# Altium PCB STMFORASIC.PcbDoc
Units mm, origin at the board's own origin, x right, y up, seen from the top; angles counter-clockwise.
Board outline 65 x 30 mm, 2 copper layers (Top Layer, Bottom Layer), stack 1.536 mm thick; 27 components, 36 nets, 187 pads, 54 vias.
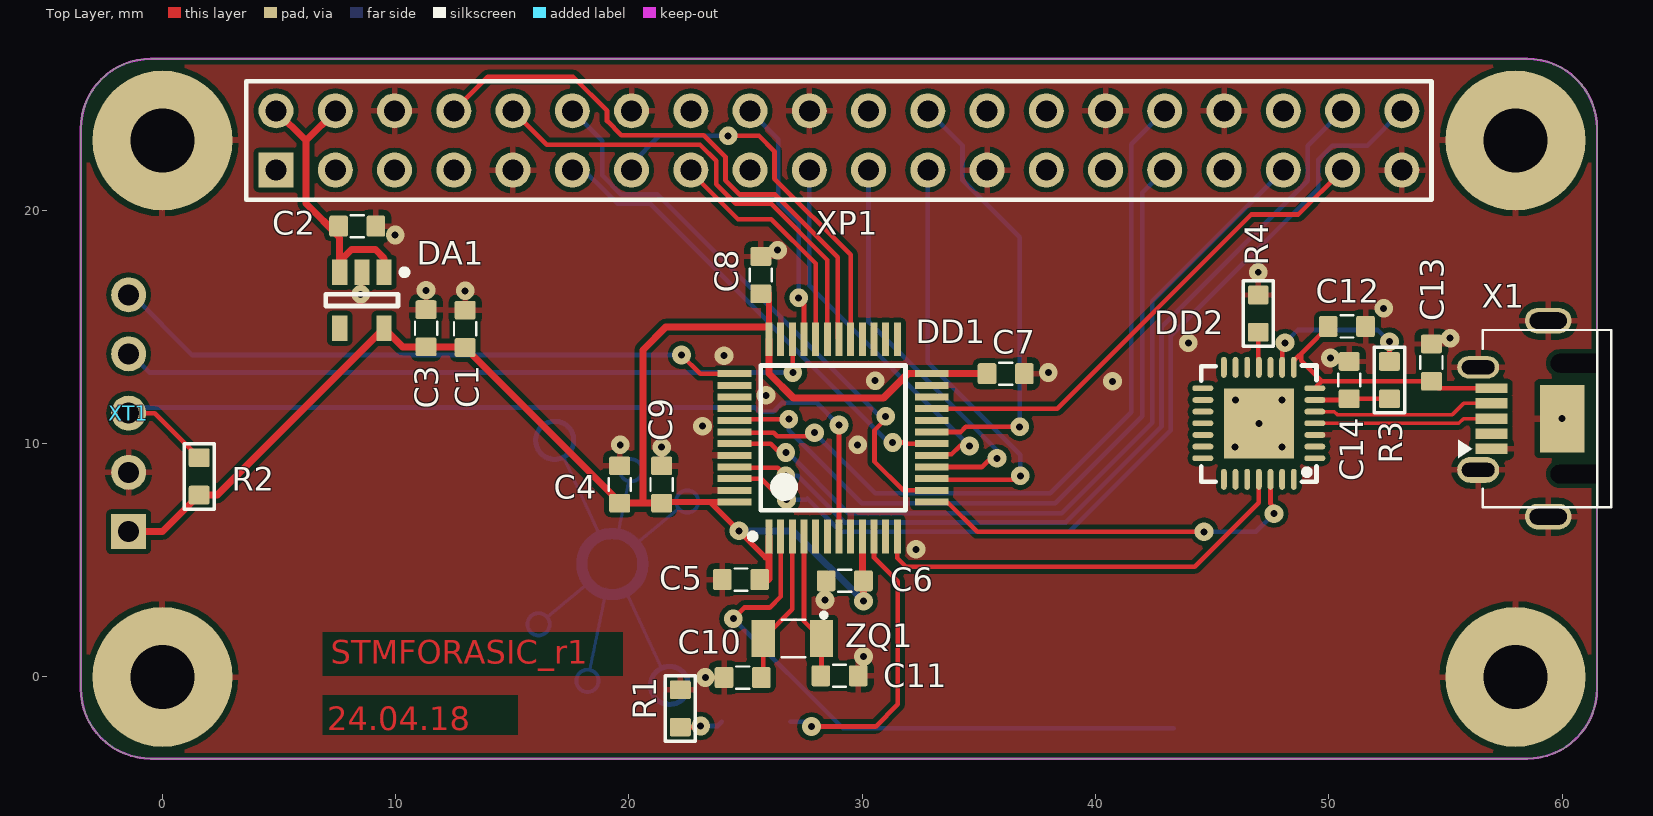
[diagram p0: Top Layer view]
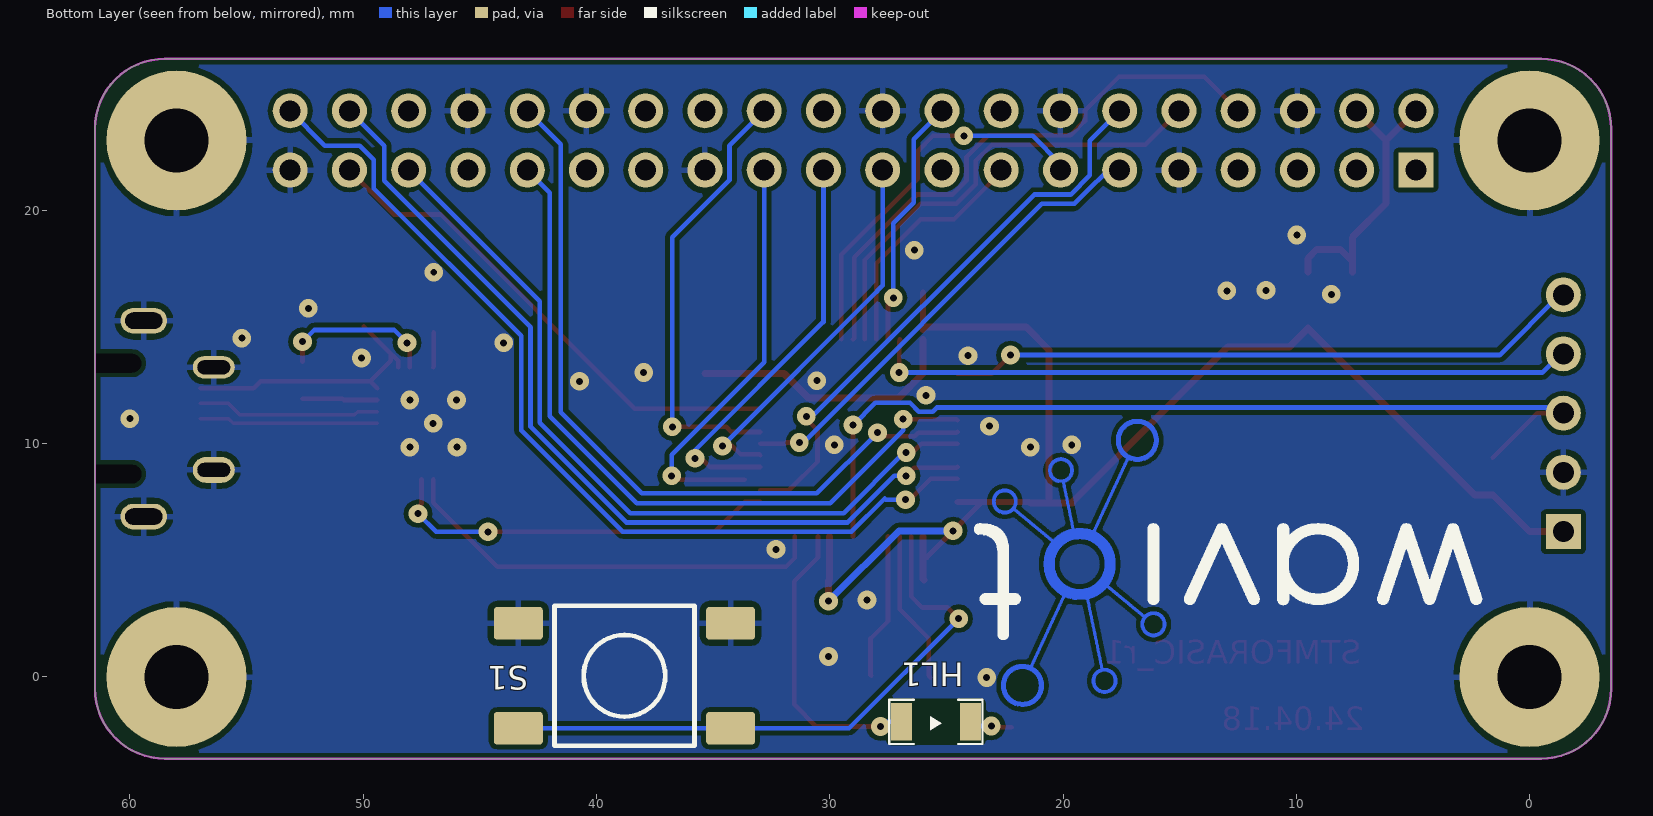
[diagram p1: Bottom Layer view, seen from below]

## Layer stack, top to bottom
Top Solder: solder mask 0.0102, Solder Resist, Dk 3.5
Top Layer: signal copper 0.018
Dielectric 1: core 1.5, Dk 4.2
Bottom Layer: signal copper 0.018
Bottom Solder: solder mask 0.0102, Solder Resist, Dk 3.5

## Board outline
-3.5,-0.5 ccw(c-0.5,-0.5) -0.5,-3.5 58.5,-3.5 ccw(c58.5,-0.5) 61.5,-0.5 61.5,23.5 ccw(c58.5,23.5) 58.5,26.5 -0.5,26.5 ccw(c-0.5,23.5) -3.5,23.5

## Design rules (kind name [scope] priority, off if disabled: settings)
Clearance [All] p1: gap=0.2 ignorepadtopadclearanceinfootprint=FALSE except(0: Arc-Hole Track-Hole SMDPad-Hole THPad-Hole Via-Hole Fill-Hole Poly-Hole Region-Hole Text-Hole)
DiffPairsRouting [All] p1: maxlimit=0.254 minlimit=0.2 mostfreqgap=0.2 toplayer_minwidth=0.15 toplayer_maxwidth=2 toplayer_prefwidth=0.25 bottomlayer_minwidth=0.15 bottomlayer_maxwidth=2 bottomlayer_prefwidth=0.25 maxuncoupledlength=12.7
PlaneClearance [All] p1: clearance=0.5
PlaneConnect [All] p1: pad.planeconnectstyle=Relief pad.reliefexpansion=0.508 pad.reliefentries=4 pad.reliefconductorwidth=0.254 pad.reliefairgap=0.254 via.planeconnectstyle=Direct via.reliefexpansion=0.508 via.reliefentries=4 via.reliefconductorwidth=0.254 via.reliefairgap=0.254
PolygonConnect [All] p1: thpad.connectstyle=Relief thpad.reliefconductorwidth=0.254 thpad.reliefentries=4 thpad.polygonreliefangle="90 Angle" thpad.airgapwidth=0.254 smdpad.connectstyle=Relief smdpad.reliefconductorwidth=0.254 smdpad.reliefentries=4 smdpad.polygonreliefangle="90 Angle" smdpad.airgapwidth=0.254 via.connectstyle=Direct via.reliefconductorwidth=0.254 via.reliefentries=4 via.polygonreliefangle="90 Angle" via.airgapwidth=0.254
RoomDefinition STMFORASIC [InComponentClass('STMFORASIC')] p1: confinementstyle=ConfineIn formatcopy=TRUE lockcomponents=FALSE outline -11.725,-5.3 66.3,-5.3 66.3,28.275 -11.725,28.275
RoutingVias [All] p1: holewidth=0.2 width=0.5 viastyle="Through Hole" minholewidth=0.2 minwidth=0.5 maxholewidth=3.5 maxwidth=4
SolderMaskExpansion [All] p1: expansion=0.102
Width [All] p1: maxlimit=2 minlimit=0.15 preferedwidth=0.2 minimp=50.000000 maximp=50.000000 favimp=50.000000
27 further rules are at their usual default settings.

## Components (designator, comment, footprint, x,y, rotation, side; value= is the part's Value field where it differs from the comment)
C1 "Nominal" CAP_0603 12.975,14.925 r90 top value="1 мкФ"
C2 "Nominal" CAP_0603 8.35,19.325 r0 top value="1 мкФ"
C3 "Nominal" CAP_0603 11.3,14.95 r270 top value="0.1 мкФ"
C4 "Nominal" CAP_0603 19.6,8.25 r90 top value="4.7 мкФ"
C5 "Nominal" CAP_0603 24.8,4.175 r180 top value="0.1 мкФ"
C6 "Nominal" CAP_0603 29.25,4.125 r180 top value="0.1 мкФ"
C7 "Nominal" CAP_0603 36.15,13 r0 top value="0.1 мкФ"
C8 "Nominal" CAP_0603 25.65,17.225 r90 top value="0.1 мкФ"
C9 "Nominal" CAP_0603 21.4,8.25 r90 top value="0.1 мкФ"
C10 "Nominal" CAP_0603 24.875,-0.025 r180 top value="10 пФ"
C11 "Nominal" CAP_0603 29.025,0.05 r0 top value="10 пФ"
C12 "Nominal" CAP_0603 50.775,15.025 r180 top value="0.1 мкФ"
C13 "Nominal" CAP_0603 54.4,13.475 r270 top value="4.7 мкФ"
C14 "Nominal" CAP_0603 50.875,12.725 r270 top value="0.1 мкФ"
DA1 "AP2127" SOT23-5AN 8.55,16.15 r270 top
DD1 "STM32L071CBT6" TSQFP50P900X900X160-48N 28.75,10.25 r90 top
DD2 "CP2102" QFN28 49.4,9.375 r180 top
HL1 "APT3216SRCPRV" LED_1206_RED_Bottom 25.45,-1.925 r180 bottom
R1 "STD_RES" RES_0603 22.2,-1.35 r90 top value="1 кОм"
R2 "STD_RES" RES_0603 1.575,8.6 r90 top value="10 кОм"
R3 "STD_RES" RES_0603 52.6,12.725 r270 top value="10 кОм"
R4 "STD_RES" RES_0603 46.975,15.575 r270 top value="10 кОм"
S1 "SMD Button" FSM_Button 38.8,0.05 r90 bottom
X1 "0475900001" 0475900001 58.305,11.075 r270 top
XP1 "PBD-40" PBD-40 29,23 r0 top
XT1 "PLS-5" HDR1X5 -1.45,6.23 r90 top
ZQ1 "KX-327NHT 32.768 kHz" KX-327NHT 27.05,1.65 r180 top value="Quartz Crystal"

## Footprints (in the part's own frame and the unit in brackets; to place one, negate y for a bottom-side part, rotate by r counter-clockwise, add the part's x,y. Pads: shape width x height; smd on the part's side, far side on the other; paste and mask are expansions set on the pad)
0475900001 [mm]
  round 0 hole 0.8 slot 2.6 at 90 deg unplated: 0(-2.375,2.5) 0(2.375,2.5)
  rect 0.4x1.38 smd mask+0.05: 1(-1.3,-1.33)
  rect 0.45x1.38 smd mask+0.05: 2(-0.65,-1.33) 3(0,-1.33) 4(0.65,-1.33) 5(1.3,-1.33)
  oval 1.1x2 hole 0.7 slot 1.6 at 90 deg: 5(-4.2,1.1) 5(4.2,1.1)
  oval 0.95x1.8 hole 0.6 slot 1.4 at 90 deg: 5(-2.2,-1.9)
  rect 2.9x1.9 smd: 5(0,1.7)
  oval 1.1x1.8 hole 0.6 slot 1.4 at 90 deg: 5(2.2,-1.9)
  silkscreen extent -3.8,-2.75 3.8,3.8, body extent -4.32,-2.1 4.33,3.8, height 2.71
CAP_0603 [mm]
  rrect20% 0.8x0.9 smd: 1(-0.8,0) 2(0.8,0)
  Top Layer pour cut-out: -0.425,0.65 0.45,0.65 0.45,-0.65 -0.425,-0.65
  silkscreen extent -0.28,-0.48 0.28,0.48, body extent -0.88,-0.48 0.87,0.48, height 0.85
FSM_Button [mm]
  rrect20% 1.4x2.1 smd: 1(-2.25,-4.55) 1(-2.25,4.55) 2(2.25,-4.55) 2(2.25,4.55)
  silkscreen extent -3,-3 3,3, body extent -3,-3 3,3, height 5
HDR1X5 [mm]
  rect 1.5x1.5 hole 0.9: 1(0,0)
  round 1.5 hole 0.9: 2(2.54,0) 3(5.08,0) 4(7.62,0) 5(10.155,0)
KX-327NHT [mm]
  rect 1x1.6 smd mask+0.05: 1(-1.2,0) 2(1.3,0)
  silkscreen extent -1.4,-1.1 0.5,0.8, body extent -1.6,-0.75 1.6,0.75, height 0.8
LED_1206_RED_Bottom [mm]
  rect 0.9x1.6 smd: 1(-1.475,0) 2(1.475,0)
  Top Layer pour cut-out: -0.85,1 0.85,1 0.85,-1 -0.85,-1
  silkscreen extent -2,-0.95 2,0.95, body extent -1.6,-0.8 1.6,0.8, height 0.25
PBD-40 [mm]
  rect 1.5x1.5 hole 0.9: 1(-24.13,-1.27)
  round 1.5 hole 0.9: 2(-24.13,1.27) 3(-21.59,-1.27) 4(-21.59,1.27) 5(-19.05,-1.27) 6(-19.05,1.27) 7(-16.51,-1.27) 8(-16.51,1.27) 9(-13.975,-1.27) 10(-13.975,1.27) 11(-11.43,-1.27) 12(-11.43,1.27) 13(-8.89,-1.27) 14(-8.89,1.27) 15(-6.35,-1.27) 16(-6.35,1.27) 17(-3.815,-1.27) 18(-3.815,1.27) 19(-1.27,-1.27) 20(-1.27,1.27) 21(1.27,-1.27) 22(1.27,1.27) 23(3.81,-1.27) 24(3.81,1.27) 25(6.35,-1.27) 26(6.35,1.27) 27(8.89,-1.27) 28(8.89,1.27) 29(11.43,-1.27) 30(11.43,1.27) 31(13.965,-1.27) 32(13.965,1.27) 33(16.51,-1.27) 34(16.51,1.27) 35(19.05,-1.27) 36(19.05,1.27) 37(21.59,-1.27) 38(21.59,1.27) 39(24.13,-1.27) 40(24.13,1.27)
  silkscreen extent -25.41,-2.55 25.41,2.55
QFN28 [mm]
  oval 0.9x0.25 smd: 1(0,0) 2(0,-0.5) 3(0,-1) 4(0,-1.5) 5(0,-2) 6(0,-2.5) 7(0,-3) 15(4.8,-3) 16(4.8,-2.5) 17(4.8,-2) 18(4.8,-1.5) 19(4.8,-1) 20(4.8,-0.5) 21(4.8,0)
  oval 0.25x0.9 smd: 8(0.9,-3.9) 9(1.4,-3.9) 10(1.9,-3.9) 11(2.4,-3.9) 12(2.9,-3.9) 13(3.4,-3.9) 14(3.9,-3.9) 22(3.9,0.9) 23(3.4,0.9) 24(2.9,0.9) 25(2.4,0.9) 26(1.9,0.9) 27(1.4,0.9) 28(0.9,0.9)
  rect 3x3 smd mask+0: 29(2.4,-1.5)
  silkscreen extent -0.08,-3.98 4.88,1, body extent -0.1,-3.95 4.9,1.05, height 1
RES_0603 [mm]
  rrect20% 0.8x0.9 smd: 1(-0.8,0) 2(0.8,0)
  Top Layer pour cut-out: -0.425,0.65 0.45,0.65 0.45,-0.65 -0.425,-0.65
  silkscreen extent -1.4,-0.65 1.4,0.65, body extent -0.85,-0.48 0.85,0.48, height 0.6
SOT23-5AN [mm]
  rect 1.1x0.65 smd: 1(-1.2,0.95) 2(-1.2,0) 3(-1.2,-0.95) 4(1.2,-0.95) 5(1.2,0.95)
  silkscreen extent -1.32,-1.55 0.25,1.95, body extent -1.5,-1.5 1.5,1.5, height 1.3
TSQFP50P900X900X160-48N [mm]
  rect 1.45x0.3 smd: 1(-4.225,2.75) 2(-4.225,2.25) 3(-4.225,1.75) 4(-4.225,1.25) 5(-4.225,0.75) 6(-4.225,0.25) 7(-4.225,-0.25) 8(-4.225,-0.75) 9(-4.225,-1.25) 10(-4.225,-1.75) 11(-4.225,-2.25) 12(-4.225,-2.75) 25(4.225,-2.75) 26(4.225,-2.25) 27(4.225,-1.75) 28(4.225,-1.25) 29(4.225,-0.75) 30(4.225,-0.25) 31(4.225,0.25) 32(4.225,0.75) 33(4.225,1.25) 34(4.225,1.75) 35(4.225,2.25) 36(4.225,2.75)
  rect 0.3x1.45 smd: 13(-2.75,-4.225) 14(-2.25,-4.225) 15(-1.75,-4.225) 16(-1.25,-4.225) 17(-0.75,-4.225) 18(-0.25,-4.225) 19(0.25,-4.225) 20(0.75,-4.225) 21(1.25,-4.225) 22(1.75,-4.225) 23(2.25,-4.225) 24(2.75,-4.225) 37(2.75,4.225) 38(2.25,4.225) 39(1.75,4.225) 40(1.25,4.225) 41(0.75,4.225) 42(0.25,4.225) 43(-0.25,4.225) 44(-0.75,4.225) 45(-1.25,4.225) 46(-1.75,4.225) 47(-2.25,4.225) 48(-2.75,4.225)
  silkscreen extent -4.35,-3.1 3.1,3.57, body extent -3.5,-3.5 3.5,3.5, height 1.6

## Part data
C1 C2: library part CC0603KRX7R7BB105, "Конденсатор CHIP-0603 1 мкФ 16 В 10% X7R", Manufacturer=YAGEO, Tolerance=10%, Autor="Цислав А.Н.", Data=09-05-2013, ID=68, PartNumber=CC0603KRX7R7BB105, Type=CHIP-0603, Диэлектрик=X7R, Напряжение="16 В", Температура=-55...+85°C
C3 C5 C6 C7 C8 C9 C12 C14: library part CC0603KRX7R7BB104, "Конденсатор CHIP-0603 0.1 мкФ 16 В 10% X7R", Manufacturer=YAGEO, Tolerance=10%, Autor=Admin, Data=08-29-2013, ID=27, PartNumber=CC0603KRX7R7BB104, Type=CHIP-0603, Диэлектрик=X7R, Напряжение="16 В", Температура=-55...+85°C
C4 C13: library part CC0603KRX5R6BB475, "Конденсатор CHIP-0603 4.7 мкФ 10 В 10% X5R", Manufacturer=YAGEO, Tolerance=10%, Autor="Цислав А.Н.", Data=09-05-2013, ID=71, PartNumber=CC0603KRX5R6BB475, Type=CHIP-0603, Диэлектрик=X5R, Напряжение="10 В", Температура=-55...+85°C
C10 C11: library part CL10C180JB8NNNC, "Конденсатор CHIP-0603 10 пФ 50 В 5% NPO", Manufacturer=Samsung, PartNumber=CC0603JRNPO9BN100, Tolerance=5%, Autor=Admin, Data=05-16-2016, ID=182, Type=CHIP-0603, Диэлектрик=NPO, Напряжение="50 В", Температура=-55...+85°C
DD1: "IC MCU 32BIT 128KB FLASH 48LQFP", Digi-Key Part Number=STM32L071CBT6-ND, Manufacturer=STMicroelectronics, Operating Temperature="-40°C ~ 85°C (TA)", Package / Case=48-LQFP, Voltage - Supply (Vcc/Vdd)="1.65 V ~ 3.6 V", ComponentLink1Description=Datasheet, ComponentLink1URL=http://www.st.com/content/ccc/resource/technical/document/datasheet/b5/24/80/11/51/59/47/f7/DM00141136.pdf/files/DM00141136.pdf/jcr:content/translations/en.DM00141136.pdf, Connectivity="I?C, IrDA, SPI, UART/USART", Core Processor="ARM® Cortex®-M0+", Core Size=32-Bit, Data Converters="A/D 13x12b", EEPROM Size="6K x 8", Number of I/O=37, Oscillator Type=Internal, Packaging=Tray, Part Number=STM32L071CBT6, Part Status=Active, Peripherals="Brown-out Detect/Reset, DMA, POR, PWM, WDT", Program Memory Size="128KB (128K x 8)", Program Memory Type=FLASH, RAM Size="20K x 8", Series="STM32 L0", Speed=32MHz, Supplier Device Package=48-LQFP
DD2: "IC USB-TO-UART BRIDGE 28VQFN", CP2102-GMR=PartNumber
HL1: "Диод Kingbright 1.85 В 20 мА", Current="20 мА", Manufacturer=Kingbright, Autor=Admin, Data=10-17-2016, ID=34, PartNumber=APT3216SRCPRV, Type=LED, U_direct="1.85 В", Температура=-40...+85°C
R1: library part RC0603FR-071K, "Резистор CHIP-0603 1 кОм 1%", Manufacturer=YAGEO, Tolerance=1%, Autor="Цислав А.Н.", Data=09-05-2013, ID=121, PartNumber=RC0603FR-071K, Type=CHIP-0603, ТКС="100 ppm/K", Температура=-55...+85°C
R2 R3 R4: library part RC0603FR-0710K, "Резистор CHIP-0603 10 кОм 1%", Manufacturer=YAGEO, Tolerance=1%, Autor="Цислав А.Н.", Data=09-05-2013, ID=169, PartNumber=RC0603FR-0710K, Type=CHIP-0603, ТКС="100 ppm/K", Температура=-55...+85°C
X1: "Разъем Molex USB", Current="500 мА", Manufacturer=Molex, Autor=Admin, Contact=5, Data=04-07-2016, ID=136, Mounting=Поверхностный, PartNumber=0475900001, Pitch="0.65 мм", Type=USB
XT1: library part PLS-5pin
ZQ1: "Микросхема Geyer  Quartz Crystal", Manufacturer=Geyer, Autor=Admin, Data=02-12-2015, ID=120, PartNumber="KX-327NHT 32.768 kHz", Type=Clocks, Температура=-40...+85°C
DA1: Comment_1=TPS61040

## Free pads (board coordinates)
  round 6 hole 2.75 unplated: nc(0,0) nc(0,23) nc(58,0) nc(58,23)

## Via types
v1: diameter 0.8, hole 0.3, Top Layer to Bottom Layer, tented both sides, 54 vias

## Nets (pads, with @x,y where several pads share a name; then routed paths per layer and width w, separated by ;. In a path a pad name is that pad's centre, name@x,y a point inside that pad or via, vN(x,y) a via of type N, cw(c..) or ccw(c..) an arc to the next point about the centre after c; other vN are vias at no path point)
GND: C1.2 C2.2 C3.1 C4.2 C5.2 C6.2 C7.2 C8.2 C9.2 C10.2 C11.2 C12.1 C13.1 C14.1 DA1.2 DD1.8 DD1.23 DD1.35 DD1.44 DD1.47 DD2.3 DD2.29 pad.nc R1.2 R4.1 S1.2 X1.5 XP1.6 XP1.9 XP1.14 XP1.20 XP1.25 XP1.30 XP1.34 XP1.39 XT1.2
  other v1: 23.275,-0.025 30.05,0.875 28.4,3.3 32.3,5.475 21.4,9.85 45.975,9.85 48,9.85 19.625,9.95 29.8,9.95 23.15,10.75 47,10.875 60.005,11.075 46,11.875 48,11.875 25.875,12.075 40.725,12.675 30.55,12.7 37.975,13.05 50.075,13.675 24.075,13.775 43.975,14.325 55.2,14.525 52.35,15.8 8.5,16.4 12.975,16.55 11.3,16.575 46.975,17.35 26.375,18.3 9.975,18.95
NetC1_1: C1.1 C3.2 C4.1 C5.1 C6.1 C7.1 C8.1 C9.1 DA1.5 DD1.1 DD1.9 DD1.24 DD1.36 DD1.48 R2.1 XT1.1 | length 73.2
  Top Layer w0.25: C1.1@12.95,14.15 C1.1 ; C4.1 C4.1@19.6,7.5 ; C9.1 21.45,7.5 23.475,7.5 ; DD1.48 23.475,7.5 ; 26,5.125 25.85,5.125 v1(24.712,6.262) 23.475,7.5 ; DD1.36@26,14.9 C8.1@26,16.475
  Top Layer w0.3: XT1.1 0.005,6.23 R2.1 2.35,7.8 DA1.5 10.3,14.15 C3.2 C1.1@12.95,14.15 ; C1.1 C4.1@19.6,7.5 ; C4.1 20.6,7.45 ; C9.1 20.6,7.45 ; C5.1@25.95,4.15 26,4.2 26,5.125 DD1.1 ; DD1.36 26,13.011 27.061,11.95 30.9,11.95 31.95,13 DD1.24 C7.1 ; DD1.36@26,14.9 25.9,15 21.575,15 20.6,14.025 20.6,7.45 ; DD1.9 30,4.175 C6.1 v1(30.05,3.25)
  Bottom Layer w0.3: v1(24.712,6.262) 27.038,6.262 v1(30.05,3.25)
NetC2_1: C2.1 DA1.1 DA1.3 XP1.2 XP1.4 | length 12.7
  Top Layer w0.3: XP1.2 6.15,22.99 ; XP1.4 7.41,24.25 6.15,22.99 ; DA1.3 DA1.3@7.6,17.825 ; DA1.1 9.5,17.95 9.125,18.325 8.1,18.325 DA1.3@7.6,17.825 ; 6.15,22.99 6.15,20.3 7.6,18.85 DA1.3@7.6,17.825
NetC10_1: C10.1 DD1.3 ZQ1.2 | length 6.6
  Top Layer w0.2: C10.1 25.75,0.05 ZQ1.2 27,2.9 DD1.3
NetC11_1: C11.1 DD1.4 ZQ1.1 | length 6.3
  Top Layer w0.2: DD1.4 27.5,2.4 ZQ1.1 28.25,0.075 C11.1
NetC12_2: C12.2 C13.2 DD2.7 DD2.8 X1.1 | length 12
  Top Layer w0.2: DD2.8 48.5,13.55 49.025,14.075 ; DD2.7 49.7,12.675 ; C12.2 49.025,14.075 ; X1.1 54.7,12.375 C13.2 49.7,12.675 ; 49.025,14.075 48.813,13.862 48.813,13.563 49.7,12.675
NetC14_2: C14.2 DD2.6 R3.2 | length 3.2
  Top Layer w0.2: DD2.6 50.825,11.875 C14.2 R3.2
NetDD1_2: DD1.2 S1.1 | length 25.8
  Top Layer w0.2: v1(24.475,2.5) 24.95,2.975 26.025,2.975 26.5,3.45 DD1.2
  Bottom Layer w0.2: v1(24.475,2.5) 29.175,-2.2 34.25,-2.2 S1.1@43.35,-2.2
NetDD1_7: DD1.7 R2.2 XT1.3 | length 39.8
  Top Layer w0.2: XT1.3 -0.335,11.31 R2.2 ; DD1.7 v1(29,10.8)
  Bottom Layer w0.2: XT1.3 -0.965,11.31 -0.725,11.55 25.41,11.55 25.585,11.375 26.185,11.375 26.56,11.75 28.05,11.75 v1(29,10.8)
NetDD1_10: DD1.10 HL1.1 | length 12.7
  Top Layer w0.2: v1(27.825,-2.125) 30.575,-2.125 31.525,-1.175 31.525,4.1 30.5,5.125 DD1.10
  Bottom Layer w0.2: HL1.1 27.625,-1.925 v1(27.825,-2.125)
NetDD1_12: DD1.12 DD2.25 | length 18.7
  Top Layer w0.2: DD1.12 31.5,5.1 31.875,4.725 44.25,4.725 47,7.475 DD2.25
NetDD1_13: DD1.13 DD2.26 | length 17.1
  Top Layer w0.2: DD1.13 33.65,7.5 34.925,6.225 v1(44.65,6.225) ; DD2.26 47.5,7.425 47.65,7.275 v1(47.65,7)
  Bottom Layer w0.2: v1(44.65,6.225) 46.875,6.225 v1(47.65,7)
NetDD1_14: DD1.14 XP1.12 | length 25.1
  Top Layer w0.2: v1(31,11.175) 31.128,11.175 30.525,10.572 30.525,9.225 31.75,8 DD1.14
  Bottom Layer w0.2: XP1.12 18.85,22.99 18.85,21.505 19.675,20.68 21.236,20.68 30.791,11.125 30.841,11.175 v1(31,11.175)
NetDD1_15: DD1.15 XP1.23 | length 17.9
  Top Layer w0.2: DD1.15@33.65,8.45 36.6,8.45 v1(36.775,8.625)
  Bottom Layer w0.2: XP1.23 32.81,13.49 36.775,9.525 v1(36.775,8.625)
NetDD1_16: DD1.16 XP1.21 | length 17.6
  Top Layer w0.2: DD1.16 35.125,9 35.5,9.375 v1(35.775,9.375)
  Bottom Layer w0.2: XP1.21 30.27,15.22 35.775,9.715 v1(35.775,9.375)
NetDD1_17: DD1.17 XP1.19 | length 16.5
  Top Layer w0.2: DD1.17 33.025,9.55 33.824,9.55 34.174,9.9 v1(34.6,9.9)
  Bottom Layer w0.2: XP1.19 27.73,16.785 27.975,16.54 27.975,16.525 v1(34.6,9.9)
NetDD1_18: DD1.18 XP1.11 | length 21
  Top Layer w0.2: v1(31.3,10.05) 31.875,10.05 31.925,10 DD1.18
  Bottom Layer w0.2: XP1.11 17.57,22.219 19.509,20.28 20.905,20.28 31.135,10.05 v1(31.3,10.05)
NetDD1_19: DD1.19 XP1.24 | length 19
  Top Layer w0.2: DD1.19 34.21,10.5 34.435,10.725 v1(36.75,10.725)
  Bottom Layer w0.2: XP1.24 34.3,22.78 34.3,21.295 36.75,18.845 v1(36.75,10.725)
NetDD1_21: DD1.21 XP1.37 | length 21.9
  Top Layer w0.2: DD1.21 38.35,11.5 46.675,19.825 48.685,19.825 XP1.37
NetDD1_29: DD1.29 XP1.13 | length 16.6
  Top Layer w0.2: v1(24.251,23.201) 25.574,23.201 26.235,22.54 26.235,21.365 29.5,18.1 DD1.29
  Bottom Layer w0.2: XP1.13 20.11,22.01 21.301,23.201 v1(24.251,23.201)
NetDD1_30: DD1.30 XP1.8 | length 24.6
  Top Layer w0.2: XP1.8 13.945,25.725 17.6,25.725 19.06,24.265 19.06,23.835 19.675,23.22 23.211,23.22 24.135,22.296 24.135,21.295 24.75,20.68 26.261,20.68 28.95,17.991 28.95,14.525 DD1.30
NetDD1_31: DD1.31 XP1.10 | length 20.1
  Top Layer w0.2: XP1.10 16.475,22.82 23.045,22.82 23.735,22.13 23.735,21.129 24.584,20.28 26.095,20.28 28.5,17.875 DD1.31
NetDD1_32: DD1.32 XP1.15 | length 10.3
  Top Layer w0.2: XP1.15 22.65,21.649 24.674,19.625 26.1,19.625 28,17.725 DD1.32
NetDD1_33: DD1.33 XP1.18 | length 10.8
  Top Layer w0.2: v1(27.275,16.25) 27.275,16.2 27.5,15.975 DD1.33
  Bottom Layer w0.2: XP1.18 26.4,23.055 26.4,20.325 27.275,19.45 v1(27.275,16.25)
NetDD1_34: DD1.34 XT1.4 | length 30.3
  Top Layer w0.2: DD1.34 26.975,14.45 27.026,14.399 v1(27.026,13.051)
  Bottom Layer w0.2: XT1.4 -1.349,13.85 -0.549,13.051 v1(27.026,13.051)
NetDD1_37: DD1.37 XT1.5 | length 27.4
  Top Layer w0.2: v1(22.25,13.8) 23.05,13 DD1.37
  Bottom Layer w0.2: XT1.5 -1.3,16.385 1.285,13.8 v1(22.25,13.8)
NetDD1_41: DD1.41 XP1.31 | length 31.8
  Top Layer w0.2: DD1.41 24.575,11.05 v1(26.85,11.05)
  Bottom Layer w0.2: v1(26.85,11.05) 26.85,10.585 29.985,7.45 38.275,7.45 42,11.175 42,20.765 XP1.31
NetDD1_42: DD1.42 XP1.32 | length 33.2
  Top Layer w0.2: DD1.42 24.55,10.475 26.211,10.475 26.361,10.325 27.8,10.325 v1(27.95,10.475)
  Bottom Layer w0.2: v1(27.95,10.475) 30.55,7.875 38.05,7.875 41.525,11.35 41.525,22.83 XP1.32
NetDD1_43: DD1.43 XP1.35 | length 33.9
  Top Layer w0.2: DD1.43 26.075,10 26.45,9.625 v1(26.726,9.625)
  Bottom Layer w0.2: v1(26.726,9.625) 26.8,9.625 29.4,7.025 38.55,7.025 42.425,10.9 42.425,16.105 XP1.35
NetDD1_45: DD1.45 XP1.38 | length 37.7
  Top Layer w0.2: DD1.45 24.55,8.975 26.375,8.975 v1(26.725,8.625)
  Bottom Layer w0.2: v1(26.725,8.625) 27.234,8.625 29.234,6.625 38.716,6.625 42.825,10.734 42.825,14.995 49.1,21.27 49.1,22.78 XP1.38
NetDD1_46: DD1.46 XP1.40 | length 40.2
  Top Layer w0.2: DD1.46 25.675,8.5 26.575,7.6 v1(26.751,7.6)
  Bottom Layer w0.2: v1(26.751,7.6) 27.594,7.6 27.644,7.65 29.069,6.225 38.881,6.225 43.225,10.569 43.225,14.625 49.54,20.94 49.54,22.165 50.155,22.78 51.64,22.78 XP1.40
NetDD2_4: DD2.4 X1.3 | length 7.7
  Top Layer w0.15: DD2.4 55.575,10.875 55.775,11.075 X1.3
NetDD2_5: DD2.5 X1.2 | length 7.8
  Top Layer w0.15: DD2.5 50.233,11.375 50.358,11.25 55.3,11.25 55.775,11.725 X1.2
NetDD2_9: DD2.9 R3.1 | length 6.9
  Top Layer w0.2: DD2.9 48,14.2 v1(48.125,14.325) ; R3.1 v1(52.6,14.375)
  Bottom Layer w0.2: v1(48.125,14.325) 48.675,14.875 52.1,14.875 v1(52.6,14.375)
NetDD2_11: DD2.11 R4.2 | length 1.5
  Top Layer w0.2: R4.2 46.975,13.3 DD2.11
NetHL1_2: HL1.2 R1.1 | length 2
  Top Layer w0.2: R1.1 23.125,-2.15 v1(23.075,-2.1)
  Bottom Layer w0.2: v1(23.075,-2.1) 23.8,-2.1 HL1.2
pads on no net: DA1.4 DD1.5 DD1.6 DD1.11 DD1.20 DD1.22 DD1.25 DD1.26 DD1.27 DD1.28 DD1.38 DD1.39 DD1.40 DD2.1 DD2.2 DD2.10 DD2.12 DD2.13 DD2.14 DD2.15 DD2.16 DD2.17 DD2.18 DD2.19 DD2.20 DD2.21 DD2.22 DD2.23 DD2.24 DD2.27 DD2.28 X1.0 X1.4 XP1.1 XP1.3 XP1.5 XP1.7 XP1.16 XP1.17 XP1.22 XP1.26 XP1.27 XP1.28 XP1.29 XP1.33 XP1.36

## Polygon pours and split planes (outlines as drawn)
GND on Bottom Layer "GND_L02_P003" (solid, pour order 3): -3.5,-0.5 ccw(c-0.5,-0.5) -0.5,-3.5 58.5,-3.5 ccw(c58.5,-0.5) 61.5,-0.5 61.5,23.5 ccw(c58.5,23.5) 58.5,26.5 -0.5,26.5 ccw(c-0.5,23.5) -3.5,23.5
GND on Top Layer "GND_L01_P002" (solid, pour order 2): -3.475,-0.5 ccw(c-0.475,-0.5) -0.475,-3.5 58.525,-3.5 ccw(c58.525,-0.5) 61.525,-0.5 61.525,23.5 ccw(c58.525,23.5) 58.525,26.5 -0.475,26.5 ccw(c-0.475,23.5) -3.475,23.5

## Keep-outs
Keep-Out Layer:
  the board outline again, w0.1

## Other copper
Top Layer:
  text "STMFORASIC_r1" at 7.225,0.575 h1
  text "24.04.18" at 7.075,-2.275 h1
Bottom Layer:
  region: 3755 vertices and 7 holes, not listed, extent 15.58,-1.279 23.033,11.054

## Silkscreen, mask and mechanical layers (free items; w line width, h text height)
Bottom Overlay:
  drawing of 5 lines, arcs and shapes, not listed
Top Solder:
  rectangle: 6.925,0.075 19.55,1.875
  rectangle: 6.9,-2.45 15.2,-0.8
Bottom Solder:
  region: 3755 vertices and 7 holes, not listed, extent 15.58,-1.279 23.033,11.054
Board shape:
  the board outline again, w0.1